# EAGLE board CT_schematic (EAGLE 7.6.0)

Size 100 x 80 mm. Coordinates in mm from the lower left corner, seen from the top.
Outline: 0,0 100,0 100,80 0,80 0,0
Copper layers (1*16): Top 0.035mm / dielectric 1.5mm / Bottom 0.035mm
Design rules "default": minimum track width 10mil, minimum drill 24mil, track to track 8mil, track to pad 8mil, pad to pad 8mil, via to via 8mil, smd to smd 8mil, copper to edge 40mil, drill to drill 8mil, minimum pad ring 10mil, minimum via ring 8mil, stop-mask expansion 4mil, vias tented up to drill 0mil, thermal gap 10mil

## Footprints (pad centres in the part's own frame; a part is rotated, then mirrored left to right if it is on the bottom)
C0603 = smd 0.8 x 0.8: 1 -0.762,0; 2 0.762,0
C0402 = smd 0.5 x 0.5: 1 -0.508,0; 2 0.508,0
C1206 = smd 1.3 x 1.6: 1 -1.524,0; 2 1.524,0
C0805 = smd 1.2 x 1.3: 1 -1.016,0; 2 1.016,0
C1210 = smd 1.2 x 2.5: 1 -1.524,0; 2 1.524,0
EXV-9H = smd 3.505 x 1.676: 1 -2.857,0; 2 2.857,0
L0603 = smd 0.8 x 0.8: 1 -0.762,0; 2 0.762,0
L1210 = smd 1.2 x 2.5: 1 -1.524,0; 2 1.524,0
PJ-037B_PACKAGE = drill 3.7 square: 1 12,0 | drill 3.2 square: 2 6,0
R0603 = smd 0.8 x 0.8: 1 -0.762,0; 2 0.762,0
LQFP64 = smd 0.3 x 1.2: 1 -3.75,-5.75; 2 -3.25,-5.75; 3 -2.75,-5.75; 4 -2.25,-5.75; 5 -1.75,-5.75; 6 -1.25,-5.75; 7 -0.75,-5.75; 8 -0.25,-5.75; 9 0.25,-5.75; 10 0.75,-5.75; 11 1.25,-5.75; 12 1.75,-5.75; 13 2.25,-5.75; 14 2.75,-5.75; 15 3.25,-5.75; 16 3.75,-5.75; 33 3.75,5.75; 34 3.25,5.75; 35 2.75,5.75; 36 2.25,5.75; 37 1.75,5.75; 38 1.25,5.75; 39 0.75,5.75; 40 0.25,5.75; 41 -0.25,5.75; 42 -0.75,5.75; 43 -1.25,5.75; 44 -1.75,5.75; 45 -2.25,5.75; 46 -2.75,5.75; 47 -3.25,5.75; 48 -3.75,5.75 | smd 1.2 x 0.3: 17 5.75,-3.75; 18 5.75,-3.25; 19 5.75,-2.75; 20 5.75,-2.25; 21 5.75,-1.75; 22 5.75,-1.25; 23 5.75,-0.75; 24 5.75,-0.25; 25 5.75,0.25; 26 5.75,0.75; 27 5.75,1.25; 28 5.75,1.75; 29 5.75,2.25; 30 5.75,2.75; 31 5.75,3.25; 32 5.75,3.75; 49 -5.75,3.75; 50 -5.75,3.25; 51 -5.75,2.75; 52 -5.75,2.25; 53 -5.75,1.75; 54 -5.75,1.25; 55 -5.75,0.75; 56 -5.75,0.25; 57 -5.75,-0.25; 58 -5.75,-0.75; 59 -5.75,-1.25; 60 -5.75,-1.75; 61 -5.75,-2.25; 62 -5.75,-2.75; 63 -5.75,-3.25; 64 -5.75,-3.75
SAMTEC_FTSH-105-01-L-DV-K = smd 0.762 x 2.794: 1 -2.54,-2.032; 2 -2.54,2.032; 3 -1.27,-2.032; 4 -1.27,2.032; 5 0,-2.032; 6 0,2.032; 7 1.27,-2.032; 8 1.27,2.032; 9 2.54,-2.032; 10 2.54,2.032
SSOP-16 = smd 1.981 x 0.356: 1 -2.464,2.223; 2 -2.464,1.587; 3 -2.464,0.953; 4 -2.464,0.318; 5 -2.464,-0.318; 6 -2.464,-0.953; 7 -2.464,-1.587; 8 -2.464,-2.223; 9 2.464,-2.223; 10 2.464,-1.587; 11 2.464,-0.953; 12 2.464,-0.318; 13 2.464,0.318; 14 2.464,0.953; 15 2.464,1.587; 16 2.464,2.223
182-009-MALE = drill 1.194 pad 1.524 octagon: 1 -5.537,10.923; 2 -2.769,10.923; 3 0,10.923; 4 2.769,10.923; 5 5.537,10.923; 6 -4.153,8.08; 7 -1.384,8.08; 8 1.384,8.08; 9 4.153,8.08 | hole 3.048: -12.446,9.501; 12.446,9.501
QFN-32 = smd 0.6 x 0.3: 1 -2.3,1.75; 2 -2.3,1.25; 3 -2.3,0.75; 4 -2.3,0.25; 5 -2.3,-0.25; 6 -2.3,-0.75; 7 -2.3,-1.25; 8 -2.3,-1.75; 17 2.3,-1.75; 18 2.3,-1.25; 19 2.3,-0.75; 20 2.3,-0.25; 21 2.3,0.25; 22 2.3,0.75; 23 2.3,1.25; 24 2.3,1.75 | smd 0.3 x 0.6: 9 -1.75,-2.3; 10 -1.25,-2.3; 11 -0.75,-2.3; 12 -0.25,-2.3; 13 0.25,-2.3; 14 0.75,-2.3; 15 1.25,-2.3; 16 1.75,-2.3; 25 1.75,2.3; 26 1.25,2.3; 27 0.75,2.3; 28 0.25,2.3; 29 -0.25,2.3; 30 -0.75,2.3; 31 -1.25,2.3; 32 -1.75,2.3 | smd 3.2 x 3.2: EXP 0,0
SJ-43515TS-SMT-TR = smd 2.2 x 3: 1 0.6,-7.4; 4 3.4,-7.4 | smd 3 x 3: 2 12.8,-7.4; 5 17,-3 | smd 2 x 3: 3 5.3,0; 6 2.5,0 | drill 1.8: P$7 4.5,-3.69; P$8 11.54,-3.69
WM-64PC = drill 0.6 pad 1: 1 -1,0.95; 2 -1,-0.95
USB-A-H = drill 0.914: 1 2.718,3.493; 2 2.718,1.003; 3 2.718,-1.003; 4 2.718,-3.493 | drill 2.311: 5 0,-6.566; 6 0,6.566
SOT143B = smd 1 x 0.7: 1 -0.75,-1 | smd 0.6 x 0.7: 2 0.95,-1; 3 0.95,1; 4 -0.95,1
ABLS-25.000MHZ-B2F-T = smd 5.6 x 2.8: 1 -3.81,0; 2 5.69,0
ASEK = smd 1.4 x 1: 1 -1.1,-0.8; 2 1.1,-0.8; 3 1.1,0.8; 4 -1.1,0.8
ASFL1 = smd 1.7 x 1.5: 1 -1.27,-1.1; 2 1.27,-1.1; 3 1.27,1.1; 4 -1.27,1.1
WSON-8 = smd 0.3 x 0.6: 1 -0.75,0; 2 0.05,0; 3 0.85,0; 4 1.65,0; 5 1.65,3.8; 6 0.85,3.8; 7 0.05,3.8; 8 -0.75,3.8 | smd 3 x 2.6: PAD 0.45,1.9
SON-6 = smd 0.55 x 0.3: 1 -0.355,0.5 | smd 0.52 x 0.3: 2 -0.37,0; 3 -0.37,-0.5; 4 0.37,-0.5; 5 0.37,0; 6 0.37,0.5
SW_4-1437565-2 = smd 1.4 x 2.1: 1 -2.23,4.55; 2 -2.23,-4.55; 3 2.23,4.55; 4 2.23,-4.55
LGM67K-G1J2-24-Z = smd 0.8 x 1.4: A -2,0; C 0,0
NC7SZ125M5X = smd 1.3 x 0.7: 1 -1.3,0.95; 2 -1.3,0; 3 -1.3,-0.95; 4 1.3,-0.95; 5 1.3,0.95
DUMMY_PACKAGE_184 = drill 0.3: 1 0,-1; 2 1.5,-1

## Placement (x,y rotation side)
C1  1e-06  [C0603]  -46.99,91.44 0 top  (outside the outline)
C2  1e-07  [C0603]  -50.8,91.44 0 top  (outside the outline)
C3  1e-07  [C0603]  -54.61,91.44 0 top  (outside the outline)
C4  1e-07  [C0603]  -58.42,91.44 0 top  (outside the outline)
C5  1e-07  [C0603]  -62.23,91.44 0 top  (outside the outline)
C6  1e-07  [C0603]  -66.04,91.44 0 top  (outside the outline)
C7  4.7e-06  [C0603]  -39.37,91.44 0 top  (outside the outline)
C8  1e-08  [C0603]  -69.85,91.44 0 top  (outside the outline)
C9  1e-06  [C0603]  -73.66,91.44 0 top  (outside the outline)
C10  1e-11  [C0402]  -87.63,96.52 0 top  (outside the outline)
C11  1e-11  [C0402]  -91.44,96.52 0 top  (outside the outline)
C12  1e-07  [C0402]  -15.24,101.6 0 top  (outside the outline)
C13  1e-06  [C0603]  -77.47,91.44 0 top  (outside the outline)
C14  1e-06  [C0603]  -81.28,91.44 0 top  (outside the outline)
C15  2.2e-07  [C0603]  -43.18,91.44 0 top  (outside the outline)
C16  1e-06  [C0603]  -85.09,91.44 0 top  (outside the outline)
C17  1e-06  [C0603]  -88.9,91.44 0 top  (outside the outline)
C18  1e-06  [C0603]  -15.24,96.52 0 top  (outside the outline)
C19  1e-06  [C0603]  -19.05,96.52 0 top  (outside the outline)
C20  1e-06  [C0603]  -22.86,96.52 0 top  (outside the outline)
C21  1e-06  [C0603]  -26.67,96.52 0 top  (outside the outline)
C22  1e-06  [C0603]  -30.48,96.52 0 top  (outside the outline)
C23  1e-06  [C0603]  -34.29,96.52 0 top  (outside the outline)
C24  1e-06  [C0603]  -38.1,96.52 0 top  (outside the outline)
C25  1e-07  [C0402]  -19.05,101.6 0 top  (outside the outline)
C26  1e-07  [C0402]  -22.86,101.6 0 top  (outside the outline)
C27  1e-07  [C0402]  -26.67,101.6 0 top  (outside the outline)
C28  1e-07  [C0402]  -30.48,101.6 0 top  (outside the outline)
C29  1e-06  [C0603]  -41.91,96.52 0 top  (outside the outline)
C30  1e-08  [C0402]  -34.29,101.6 0 top  (outside the outline)
C31  1e-08  [C0402]  -38.1,101.6 0 top  (outside the outline)
C32  1e-08  [C0402]  -41.91,101.6 0 top  (outside the outline)
C33  1e-05  [C1206]  -29.21,85.09 0 top  (outside the outline)
C34  1e-05  [C0805]  -53.34,85.09 0 top  (outside the outline)
C35  1e-08  [C0402]  -45.72,101.6 0 top  (outside the outline)
C36  1e-05  [C1206]  -35.56,85.09 0 top  (outside the outline)
C37  1e-05  [C1210]  -16.51,86.36 0 top  (outside the outline)
C38  1e-07  [C0402]  -49.53,101.6 0 top  (outside the outline)
C39  0.0001  [EXV-9H]  -38.1,78.74 0 top  (outside the outline)
C40  0.0001  [EXV-9H]  -49.53,78.74 0 top  (outside the outline)
C41  1e-08  [C0402]  -53.34,101.6 0 top  (outside the outline)
C42  1e-08  [C0402]  -57.15,101.6 0 top  (outside the outline)
F1  240.0  [L0603]  -45.72,96.52 0 top  (outside the outline)
I1  1e-05  [L1210]  -22.86,86.36 0 top  (outside the outline)
J1  PJ-037B  [PJ-037B_PACKAGE]  -83.82,44.45 0 top  (outside the outline)
R2  1000.0  [R0603]  -49.53,96.52 0 top  (outside the outline)
R4  4700.0  [R0603]  -53.34,96.52 0 top  (outside the outline)
R5  10000.0  [R0603]  -83.82,85.09 0 top  (outside the outline)
R6  10000.0  [R0603]  -88.9,85.09 0 top  (outside the outline)
R7  10000.0  [R0603]  -15.24,91.44 0 top  (outside the outline)
R8  10000.0  [R0603]  -20.32,91.44 0 top  (outside the outline)
R9  10000.0  [R0603]  -25.4,91.44 0 top  (outside the outline)
R10  5.0  [R0603]  -57.15,96.52 0 top  (outside the outline)
R11  100000.0  [R0603]  -58.42,85.09 0 top  (outside the outline)
R12  1270.0  [R0603]  -60.96,96.52 0 top  (outside the outline)
R13  1270.0  [R0603]  -64.77,96.52 0 top  (outside the outline)
R14  100000.0  [R0603]  -63.5,85.09 0 top  (outside the outline)
R15  200.0  [R0603]  -68.58,96.52 0 top  (outside the outline)
R16  1000.0  [R0603]  -72.39,96.52 0 top  (outside the outline)
R17  100000.0  [R0603]  -68.58,85.09 0 top  (outside the outline)
R18  2231.0  [R0603]  -76.2,96.52 0 top  (outside the outline)
R19  1000.0  [R0603]  -80.01,96.52 0 top  (outside the outline)
R20  10000.0  [R0603]  -30.48,91.44 0 top  (outside the outline)
R21  10000.0  [R0603]  -35.56,91.44 0 top  (outside the outline)
R22  9100.0  [R0603]  -83.82,96.52 0 top  (outside the outline)
R23  680000.0  [R0603]  -73.66,85.09 0 top  (outside the outline)
R24  120000.0  [R0603]  -78.74,85.09 0 top  (outside the outline)
U1  STM32F302RBT7  [LQFP64]  -24.13,58.42 0 top  (outside the outline)
U2  FTSH-105-01-L-DV-K  [SAMTEC_FTSH-105-01-L-DV-K]  -35.56,30.48 0 top  (outside the outline)
U3  LTC2804CGN-1#PBF  [SSOP-16]  -66.04,57.15 0 top  (outside the outline)
U4  182-009-113R531  [182-009-MALE]  -36.83,6.35 0 top  (outside the outline)
U5  SGTL5000XNAA3  [QFN-32]  -22.86,69.85 0 top  (outside the outline)
U6  SJ-43515TS-SMT-TR  [SJ-43515TS-SMT-TR]  -68.58,31.75 0 top  (outside the outline)
U7  SJ-43515TS-SMT-TR  [SJ-43515TS-SMT-TR]  -39.37,46.99 0 top  (outside the outline)
U8  SJ-43515TS-SMT-TR  [SJ-43515TS-SMT-TR]  -67.31,46.99 0 top  (outside the outline)
U9  WM-64PCT  [WM-64PC]  -77.47,57.15 0 top  (outside the outline)
U10  61400416021  [USB-A-H]  -59.69,8.89 0 top  (outside the outline)
U11  prtr5v0u2ax  [SOT143B]  -69.85,101.6 0 top  (outside the outline)
U12  ABLS-25.000MHZ-B2F-T  [ABLS-25.000MHZ-B2F-T]  -68.58,78.74 0 top  (outside the outline)
U13  ASEK-32.768KHz-ECST  [ASEK]  -29.21,78.74 0 top  (outside the outline)
U14  ASFL-24.57MHZ-NCS  [ASFL1]  -82.55,69.85 0 top  (outside the outline)
U15  LP3878SDX-ADJ/NOPB  [WSON-8]  -44.45,68.58 0 top  (outside the outline)
U16  LP3878SDX-ADJ/NOPB  [WSON-8]  -64.77,68.58 0 top  (outside the outline)
U17  TPS3895ADRYR  [SON-6]  -77.47,100.33 0 top  (outside the outline)
U18  4-1437565-2  [SW_4-1437565-2]  -45.72,58.42 0 top  (outside the outline)
U19  Q65110A2395  [LGM67K-G1J2-24-Z]  -80.01,78.74 0 top  (outside the outline)
U20  nc7sz125m5x  [NC7SZ125M5X]  -40.64,85.09 0 top  (outside the outline)
U21  nc7sz125m5x  [NC7SZ125M5X]  -46.99,85.09 0 top  (outside the outline)
U22  Dummy  [DUMMY_PACKAGE_184]  -74.93,101.6 0 top  (outside the outline)

## Library data of the parts
C1-C42 F1 I1 J1 R2 R4-R24 U1-U22 = circuit_tree

## Nets
CLK_CRYSTAL_U1_5: C10.1 U1.5 U12.1
CLK_CRYSTAL_U1_6: C11.1 U1.6 U12.2
CLK_U1_3: U1.3 U13.3
CLK_U5_21: U5.21 U14.3
GND: C1.2 C2.2 C3.2 C4.2 C5.2 C6.2 C7.2 C8.2 C9.2 C10.2 C11.2 C12.2 C13.2 C14.2 C16.2 C17.2 C25.2 C26.2 C27.2 C28.2 C29.2 C30.2 C31.2 C32.2 C33.2 C34.2 C35.2 C36.2 C37.2 C38.2 C39.2 C40.2 C41.2 C42.2 J1.2 R2.2 R5.2 R9.2 R10.2 R13.2 R16.2 R19.2 R22.2 R24.2 U1.12 U1.31 U1.47 U1.63 U2.3 U2.5 U3.8 U4.5 U5.1 U5.3 U5.7 U5.EXP U7.1 U8.1 U9.2 U10.4 U10.5 U10.6 U11.1 U13.2 U14.2 U15.3 U15.PAD U16.3 U16.PAD U17.2 U19.C U20.2 U20.3 U21.1 U21.3 U22.1
NET_U1_7: R4.1 U1.7 U21.4
NET_U1_13: C8.1 C9.1 F1.1 U1.13
NET_U1_60: R5.1 U1.60
NET_U1_61: U19.A
NET_U1_62: U18.3 U18.4
NET_U2_9: R10.1 U2.9
NET_U3_6: C13.1 U3.6
NET_U3_7: C15.1 I1.2 U3.7
NET_U3_9: C14.1 U3.9
NET_U3_10: C15.2 U3.10
NET_U3_11: R11.1 U3.11
NET_U4_2: U3.1 U4.2
NET_U4_3: U3.3 U4.3
NET_U4_7: U3.2 U4.7
NET_U4_8: U3.4 U4.8
NET_U5_10: C28.1 U5.10
NET_U5_29: R12.1 U5.29
NET_U5_31: R13.1 U5.31
NET_U6_1: U5.4 U6.1
NET_U6_2: U5.2 U6.2
NET_U6_5: U5.6 U6.5
NET_U7_2: C19.1 U7.2
NET_U7_5: C18.1 U7.5
NET_U7_11: C19.2
NET_U7_12: C18.2
NET_U8_2: C21.1 C22.1 U8.2
NET_U8_5: C20.1 U8.5
NET_U8_13: C21.2 C22.2
NET_U8_14: C20.2
NET_U9_1: C23.1 C24.1 C29.1 U5.16 U9.1
NET_U9_15: C23.2 C24.2
NET_U11_4: U10.1 U11.4
NET_U15_1: C32.1 U15.1
NET_U15_6: R15.2 R16.1 U15.6
NET_U15_8: R14.1 U15.8
NET_U16_1: C35.1 U16.1
NET_U16_6: R18.2 R19.1 U16.6
NET_U16_8: R17.1 U16.8
NET_U17_1: R21.1 R22.1 U17.1
NET_U17_3: R23.2 R24.1 U17.3
NET_U17_4: R20.1 U17.4 U20.4 U21.2
NET_U18_1: R2.1 U18.1 U18.2
PROC_DAC_OUT1: U1.20 U22.2
PROC_I2S2_CK: U1.34 U5.24
PROC_I2S2_EXT_SD: U1.35 U5.25
PROC_I2S2_SD: U1.36 U5.26
PROC_I2S2_WS: U1.33 U5.23
PROC_SYS_JTCK_SWCLK: R9.1 U1.49 U2.4
PROC_SYS_JTDI: R7.1 U1.50 U2.8
PROC_SYS_JTDO_TRACESWO: U1.55 U2.6
PROC_SYS_JTMS_SWDIO: R8.1 U1.46 U2.2
PROC_UART4_RX: U1.52 U3.16
PROC_UART4_TX: U1.51 U3.14
PROC_USB_DM: U10.2 U11.3
PROC_USB_DP: U10.3 U11.2
RST_OUT_U2_JTAG_RST_B: R6.1 U2.10 U20.1
VCC_S1_5V3: C33.1 C36.1 C39.1 C40.1 J1.1 R14.2 R17.2 U15.4 U16.4
VCC_TIER1_1V2: C25.1 C34.1 R15.1 U5.30 U15.5
VCC_TIER1_3V3: C1.1 C2.1 C3.1 C4.1 C5.1 C6.1 C7.1 C12.1 C16.1 C17.1 C26.1 C27.1 C30.1 C31.1 C37.1 C38.1 C41.1 C42.1 F1.2 I1.1 R4.2 R6.2 R7.2 R8.2 R11.2 R12.2 R18.1 R20.2 R21.2 R23.1 U1.1 U1.19 U1.32 U1.48 U1.64 U2.1 U3.5 U3.12 U5.5 U5.20 U13.4 U14.4 U16.5 U17.6 U20.5 U21.5

## Tracks (layer width: path | path; a pad name or v marks a point on that pad's centre or on a via)
CLK_CRYSTAL_U1_5  (2 unrouted)
CLK_CRYSTAL_U1_6  (2 unrouted)
CLK_U1_3  (1 unrouted)
CLK_U5_21  (1 unrouted)
GND  (75 unrouted)
NET_U1_7  (2 unrouted)
NET_U1_13  (3 unrouted)
NET_U1_60  (1 unrouted)
NET_U1_62  (1 unrouted)
NET_U2_9  (1 unrouted)
NET_U3_6  (1 unrouted)
NET_U3_7  (2 unrouted)
NET_U3_9  (1 unrouted)
NET_U3_10  (1 unrouted)
NET_U3_11  (1 unrouted)
NET_U4_2  (1 unrouted)
NET_U4_3  (1 unrouted)
NET_U4_7  (1 unrouted)
NET_U4_8  (1 unrouted)
NET_U5_10  (1 unrouted)
NET_U5_29  (1 unrouted)
NET_U5_31  (1 unrouted)
NET_U6_1  (1 unrouted)
NET_U6_2  (1 unrouted)
NET_U6_5  (1 unrouted)
NET_U7_2  (1 unrouted)
NET_U7_5  (1 unrouted)
NET_U8_2  (2 unrouted)
NET_U8_5  (1 unrouted)
NET_U8_13  (1 unrouted)
NET_U9_1  (4 unrouted)
NET_U9_15  (1 unrouted)
NET_U11_4  (1 unrouted)
NET_U15_1  (1 unrouted)
NET_U15_6  (2 unrouted)
NET_U15_8  (1 unrouted)
NET_U16_1  (1 unrouted)
NET_U16_6  (2 unrouted)
NET_U16_8  (1 unrouted)
NET_U17_1  (2 unrouted)
NET_U17_3  (2 unrouted)
NET_U17_4  (3 unrouted)
NET_U18_1  (2 unrouted)
PROC_DAC_OUT1  (1 unrouted)
PROC_I2S2_CK  (1 unrouted)
PROC_I2S2_EXT_SD  (1 unrouted)
PROC_I2S2_SD  (1 unrouted)
PROC_I2S2_WS  (1 unrouted)
PROC_SYS_JTCK_SWCLK  (2 unrouted)
PROC_SYS_JTDI  (2 unrouted)
PROC_SYS_JTDO_TRACESWO  (1 unrouted)
PROC_SYS_JTMS_SWDIO  (2 unrouted)
PROC_UART4_RX  (1 unrouted)
PROC_UART4_TX  (1 unrouted)
PROC_USB_DM  (1 unrouted)
PROC_USB_DP  (1 unrouted)
RST_OUT_U2_JTAG_RST_B  (2 unrouted)
VCC_S1_5V3  (8 unrouted)
VCC_TIER1_1V2  (4 unrouted)
VCC_TIER1_3V3  (45 unrouted)